# Altium PCB 底座.PcbDoc
Units mil, origin at the board's own origin, x right, y up, seen from the top; angles counter-clockwise.
Board outline 2975 x 2295 mil, 2 copper layers (Top Layer, Bottom Layer); 10 components, 38 nets, 76 pads, 0 vias.
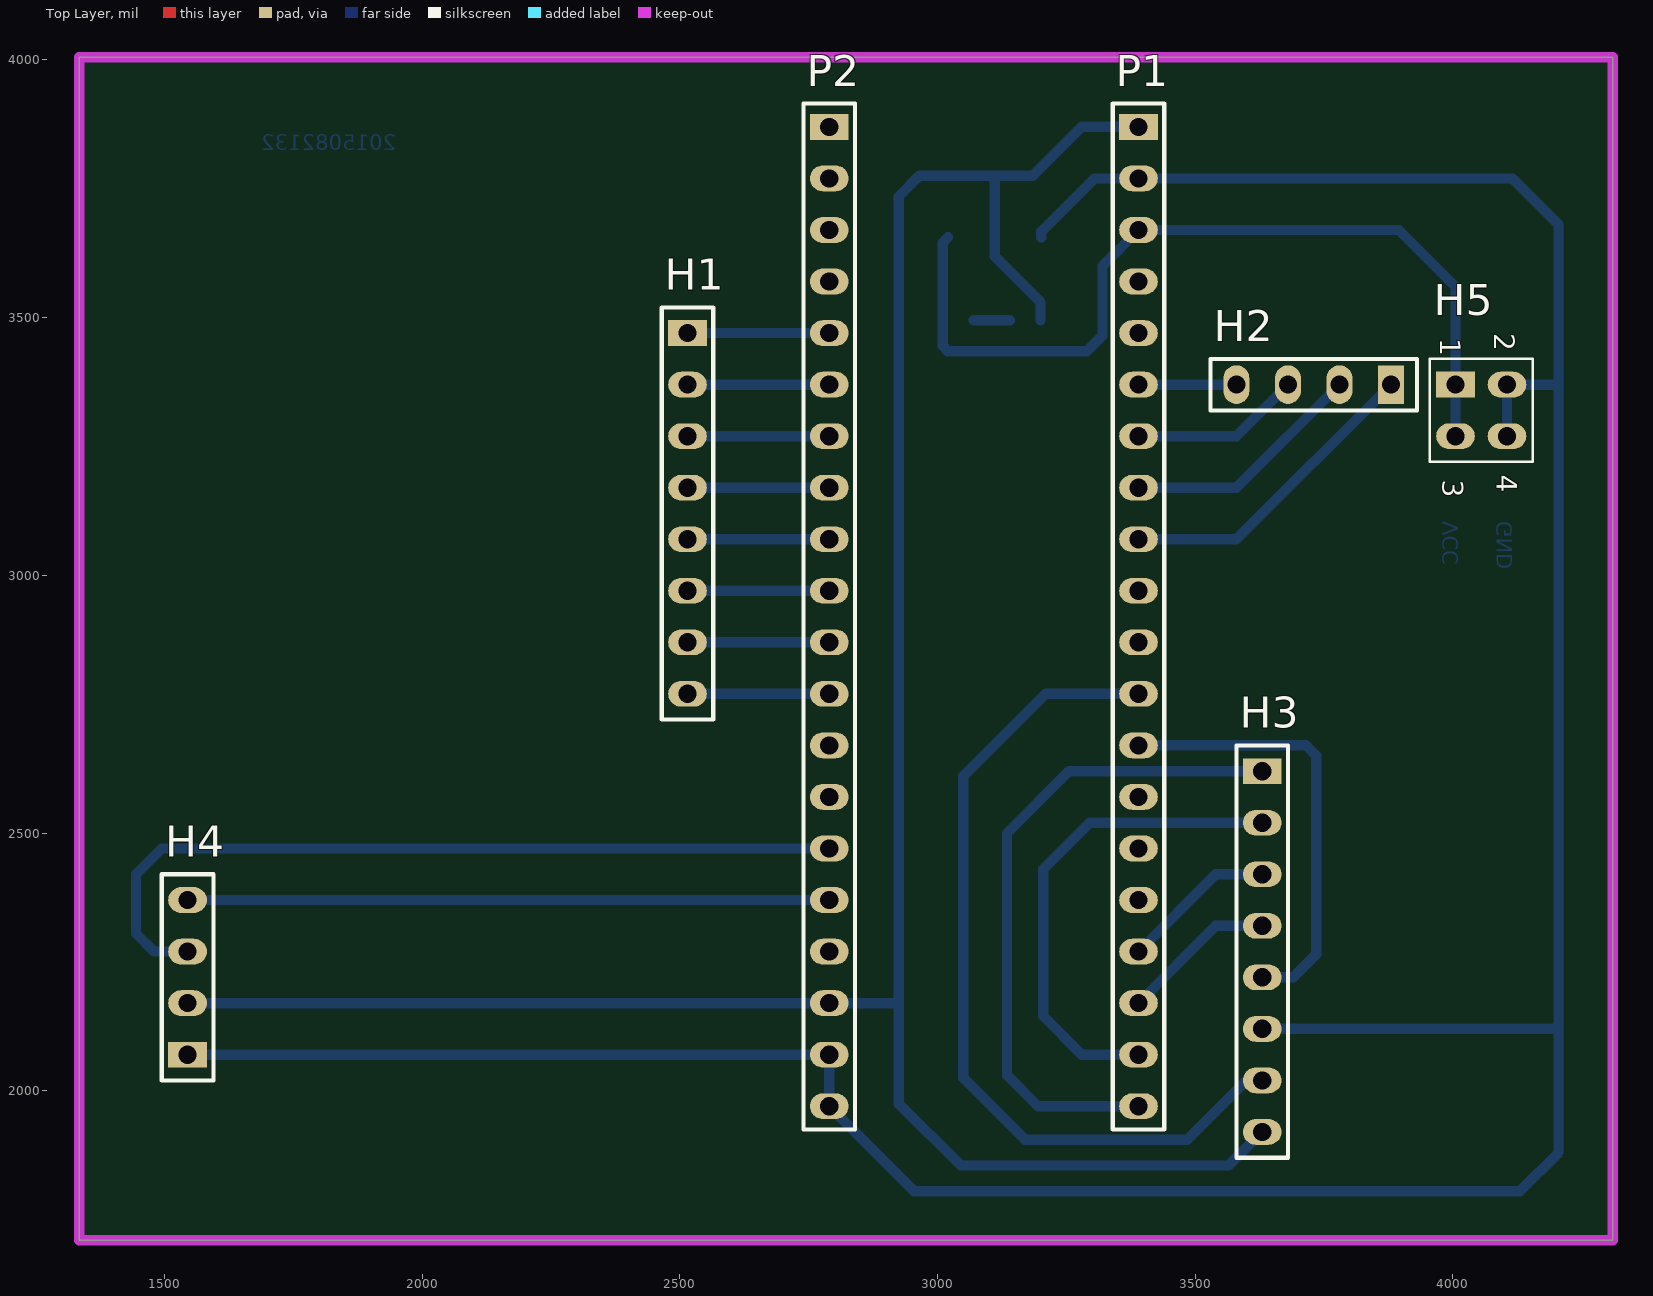
[diagram p0: Top Layer view]
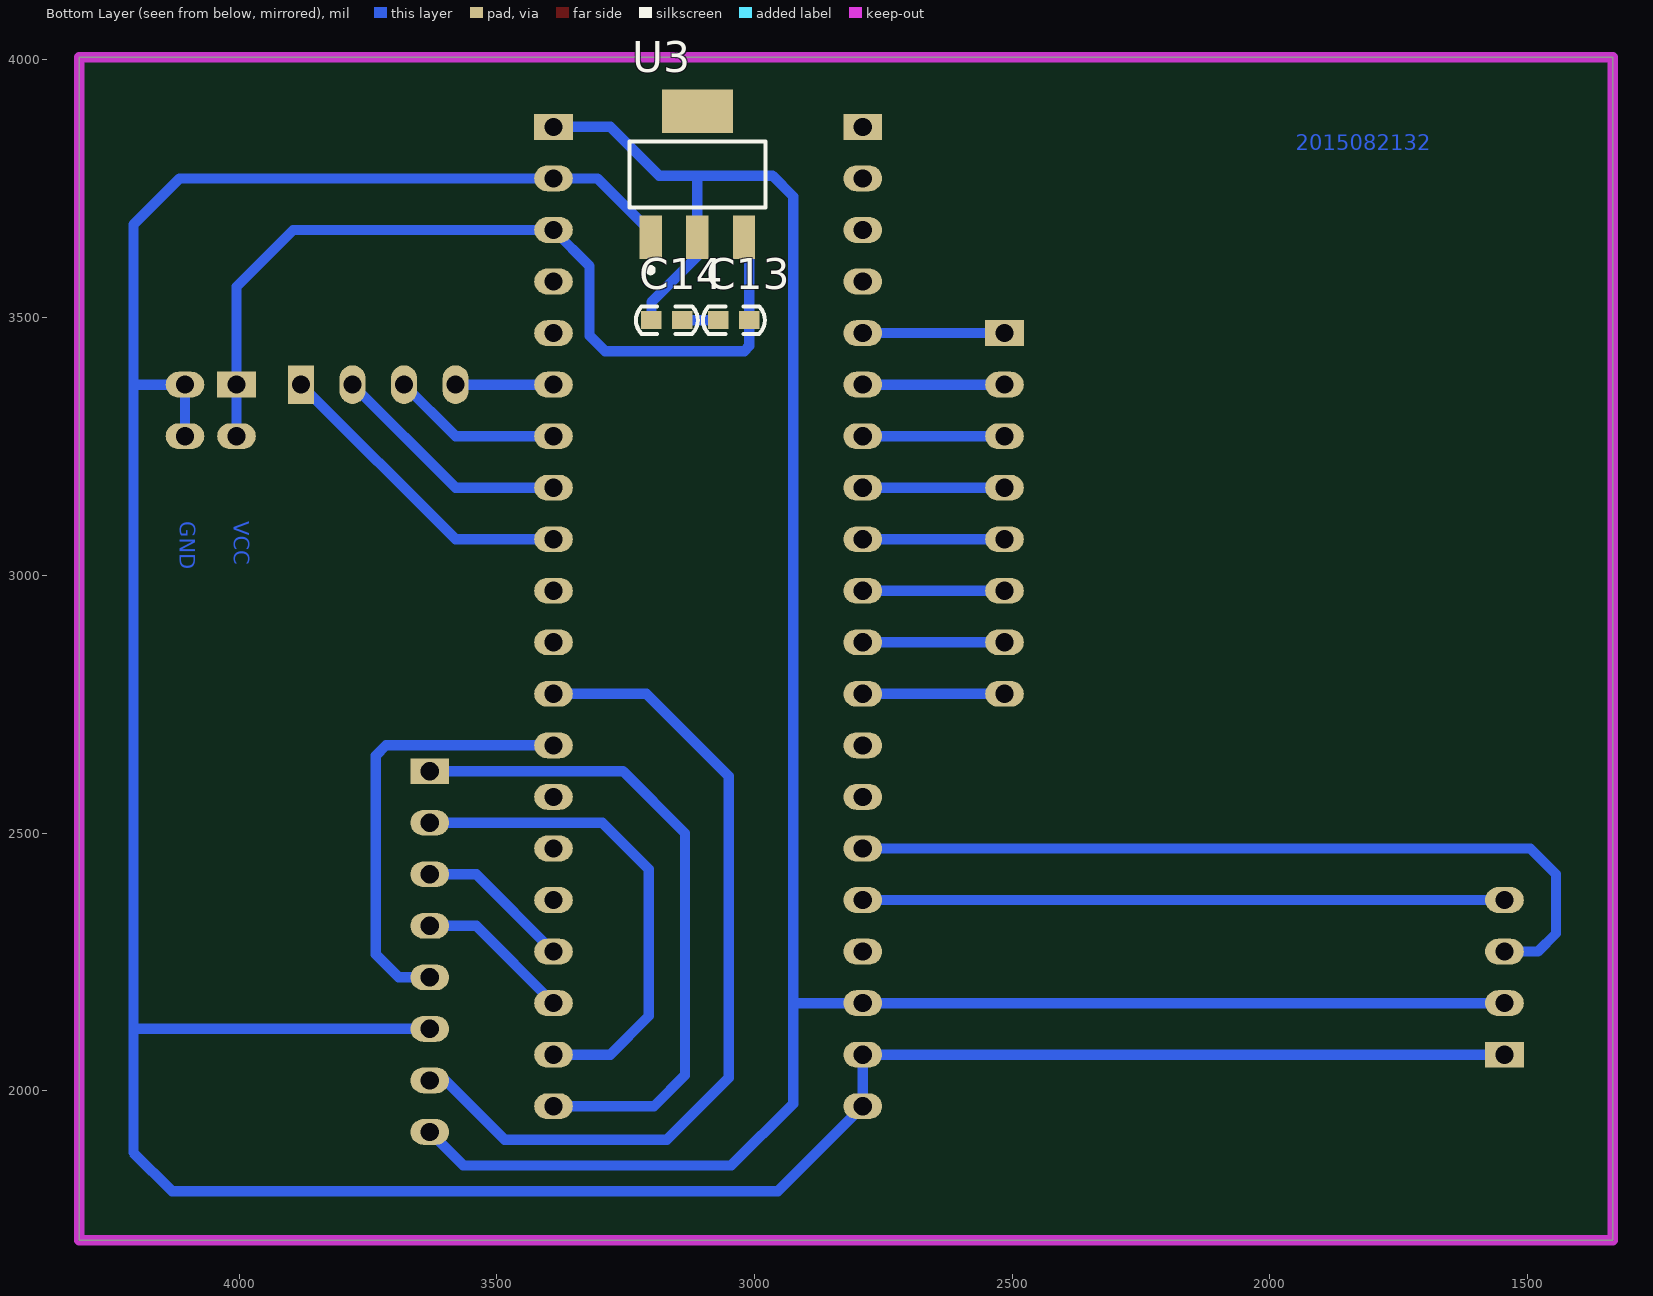
[diagram p1: Bottom Layer view, seen from below]
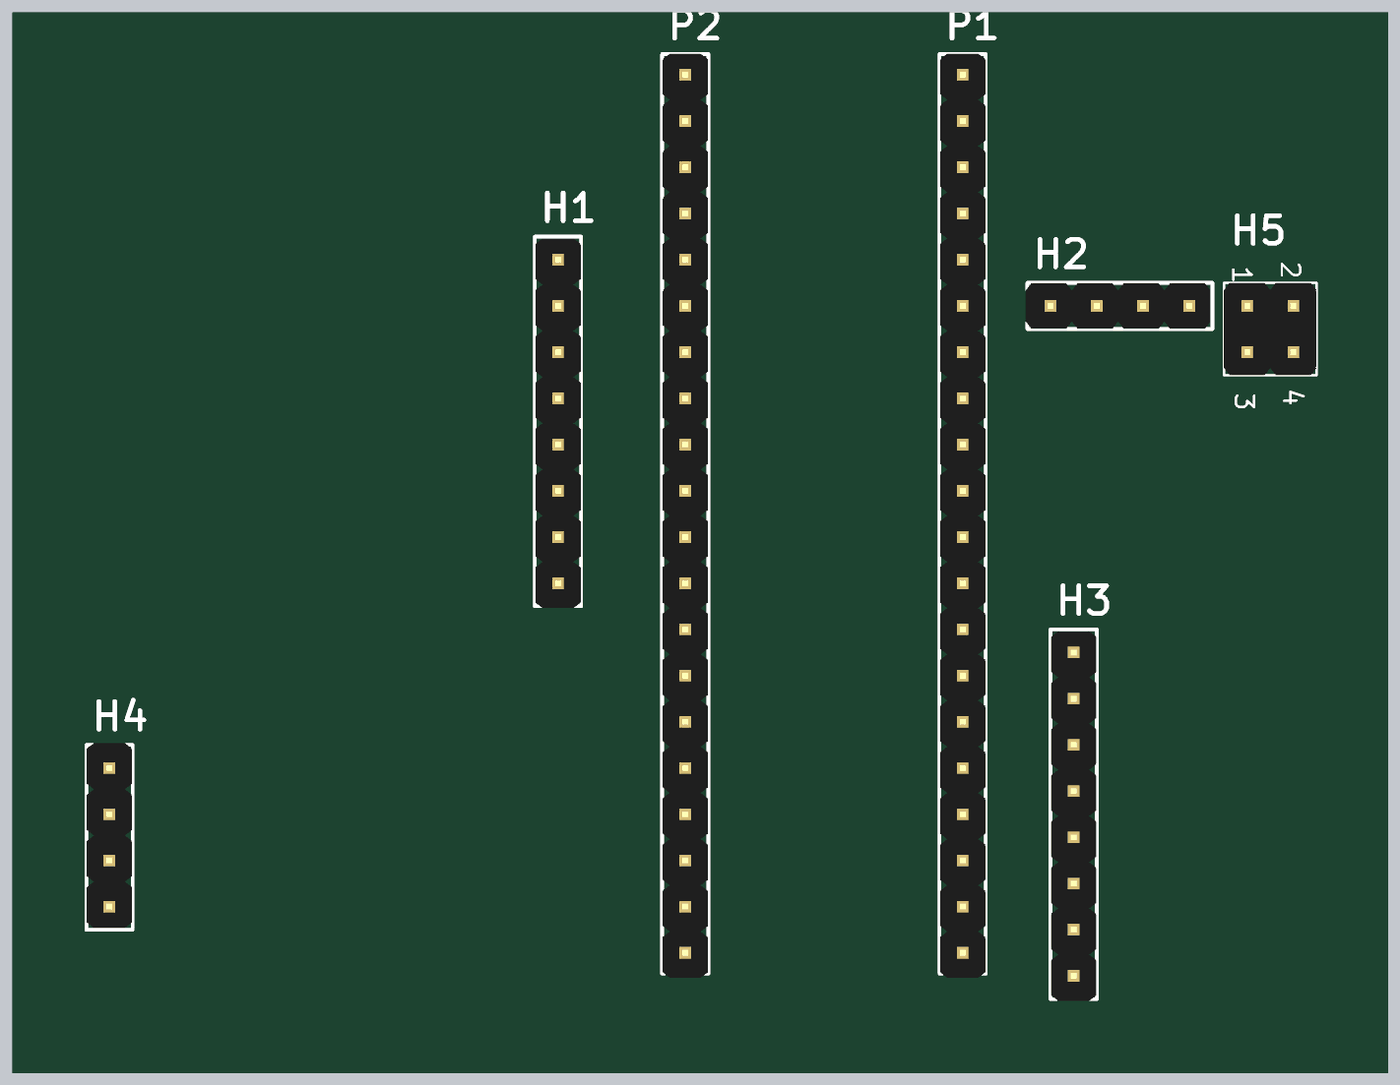
[diagram p2: 3D render of the assembled board from above, using the file's embedded part models]
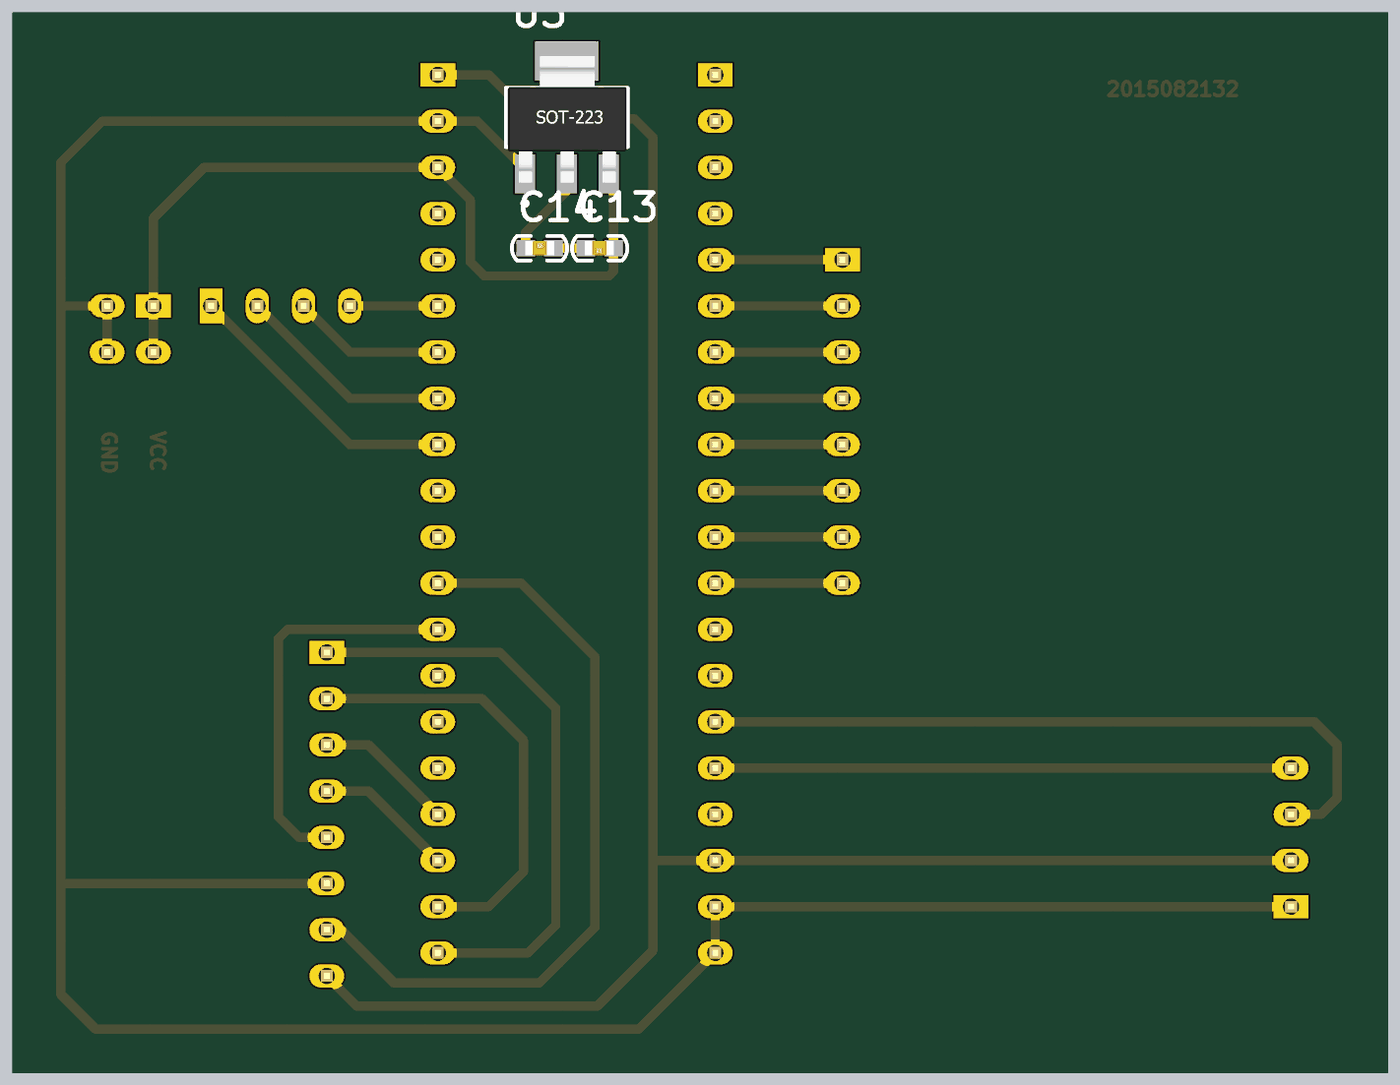
[diagram p3: 3D render of the assembled board from below, using the file's embedded part models]

## Layer stack, top to bottom
Top Layer: signal copper 1.4
Dielectric: dielectric 12.6, FR-4, Dk 4.8
Bottom Layer: signal copper 1.4

## Board outline
4310,4005 4310,1710 1355,1710 1335,1710 1335,4005

## Design rules (kind name [scope] priority, off if disabled: settings)
Clearance [All] p1: gap=10
PolygonConnect [All] p1: connectstyle=Relief reliefconductorwidth=10 reliefentries=4 polygonreliefangle="90 Angle"
RoutingVias [All] p1: holewidth=28 width=50 viastyle="Through Hole" minholewidth=28 minwidth=50 maxholewidth=28 maxwidth=50
SilkscreenOverComponentPads [All] p1: minsilkscreentomaskgap=10
SolderMaskExpansion [All] p1: expansion=4
Width [All] p1: maxlimit=25 minlimit=20 preferedwidth=20
27 further rules are at their usual default settings.

## Components (designator, comment, footprint, x,y, rotation, side; value= is the part's Value field where it differs from the comment)
C13 "" 0603C 3040,3495 r0 bottom
C14 "" 0603C 3170,3495 r180 bottom
H1 "Header 8" HDR1X8 2515,3120 r270 top
H2 "Header 4" HDR1X4 3730,3370 r180 top
H3 "Header 8" HDR1X8 3630,2270 r270 top
H4 "Header 4" HDR1X4 1545,2220 r90 top
H5 "Header 2X2" HDR2X2 4055,3320 r270 top
P1 "Header 20" HDR1X20 3390,2920 r270 top
P2 "Header 20" HDR1X20 2790,2920 r270 top
U3 "AMS1117adj" SOT223 3105,3770 r180 bottom

## Footprints (in the part's own frame and the unit in brackets; to place one, negate y for a bottom-side part, rotate by r counter-clockwise, add the part's x,y. Pads: shape width x height; smd on the part's side, far side on the other; paste and mask are expansions set on the pad)
0603C [mil]
  rect 40x35 smd: 1(-30,0) 2(30,0)
  silkscreen extent -60,-27 60,27, body extent -31,-16 32,16, height 12
HDR1X4 [mm] "Connector; Heade"
  rect 1.27x1.905 hole 0.9: 1(-3.81,0)
  oval 1.27x1.905 hole 0.9: 2(-1.27,0) 3(1.27,0) 4(3.81,0)
  silkscreen extent -5.08,-1.27 5.08,1.27, body extent -4.98,-1.25 5.18,1.25, height 8.2
HDR1X8 [mm] "Connector; Heade"
  rect 1.27x1.905 hole 0.9: 1(-8.89,0)
  oval 1.27x1.905 hole 0.9: 2(-6.35,0) 3(-3.81,0) 4(-1.27,0) 5(1.27,0) 6(3.81,0) 7(6.35,0) 8(8.89,0)
  silkscreen extent -10.16,-1.27 10.16,1.27, body extent -10.06,-1.25 10.26,1.25, height 8.2
HDR1X20 [mm] "Connector; Header"
  rect 1.27x1.905 hole 0.9: 1(-24.13,0)
  oval 1.27x1.905 hole 0.9: 2(-21.59,0) 3(-19.05,0) 4(-16.51,0) 5(-13.97,0) 6(-11.43,0) 7(-8.89,0) 8(-6.35,0) 9(-3.81,0) 10(-1.27,0) 11(1.27,0) 12(3.81,0) 13(6.35,0) 14(8.89,0) 15(11.43,0) 16(13.97,0) 17(16.51,0) 18(19.05,0) 19(21.59,0) 20(24.13,0)
  silkscreen extent -25.27,-1.27 25.27,1.27, body extent -25.3,-1.25 25.5,1.25, height 8.2
HDR2X2 [mm]
  rect 1.27x1.905 hole 0.9: 1(-1.27,-1.27)
  oval 1.27x1.905 hole 0.9: 2(-1.27,1.27) 3(1.27,-1.27) 4(1.27,1.27)
  silkscreen extent -2.54,-2.54 2.54,2.54, body extent -2.54,-2.54 2.54,2.54, height 8.5
SOT223 [mm]
  rect 1.1x2.15 smd: 1(-2.452,-2.897) 2(-0.152,-2.897) 3(2.148,-2.897)
  rect 3.5x2.15 smd: 4(-0.152,3.303)
  silkscreen extent -3.5,-4.65 3.2,1.83, body extent -3.38,-3.38 3.12,3.58, height 1.68

## Part data
C13 C14: library part Cap_0603
H1 H3: "Header, 8-Pin"
H2 H4: "Header, 4-Pin"
H5: "Header, 2-"
P1 P2: "Header, 20-Pin"
U3: "È"

## Nets (pads, with @x,y where several pads share a name; then routed paths per layer and width w, separated by ;. In a path a pad name is that pad's centre, name@x,y a point inside that pad or via, vN(x,y) a via of type N, cw(c..) or ccw(c..) an arc to the next point about the centre after c; other vN are vias at no path point)
5V: C13.1 H5.1 H5.3 P1.3 U3.3 | length 1726.4
  Bottom Layer w20: U3.3 3010,3645.5 3010,3445 3020,3435 3290,3435 3320,3465 3320,3600 P1.3 3895,3670 4005,3560 H5.1 H5.3
CS: H3.1 P1.20 | length 1294.6
  Bottom Layer w20: P1.20 3195,1970 3135,2030 3135,2500 3255,2620 H3.1
GND: H3.6 H4.1 H5.2 H5.4 P1.2 P2.19 P2.20 U3.1 | length 6528.6
  Bottom Layer w20: H4.1 P2.19 P2.20 2955,1805 4130,1805 4205,1880 4205,2120 ; U3.1 3201.55,3666.55 3305,3770 P1.2 4115,3770 4205,3680 4205,3370 ; H3.6 4205,2120 ; H5.4 H5.2 4205,3370 ; 4205,2120 4205,3370
IRQ: H3.5 P1.13 | length 861.9
  Bottom Layer w20: P1.13 3715,2670 3735,2650 3735,2265 3690,2220 H3.5
MISO: H3.4 P1.18 | length 302.1
  Bottom Layer w20: P1.18 3540,2320 H3.4
MOSI: H3.3 P1.17 | length 302.1
  Bottom Layer w20: P1.17 3540,2420 H3.3
NetC13_2: C13.2 C14.2 | length 70
  Bottom Layer w20: C13.2 C14.2
NRST: P2.17
PA0: H1.1 P2.5 | length 275
  Bottom Layer w20: H1.1 P2.5
PA1: H1.2 P2.6 | length 275
  Bottom Layer w20: H1.2 P2.6
PA2: H1.3 P2.7 | length 275
  Bottom Layer w20: H1.3 P2.7
PA3: H1.4 P2.8 | length 275
  Bottom Layer w20: H1.4 P2.8
PA4: H1.5 P2.9 | length 275
  Bottom Layer w20: H1.5 P2.9
PA5: H1.6 P2.10 | length 275
  Bottom Layer w20: H1.6 P2.10
PA6: H1.7 P2.11 | length 275
  Bottom Layer w20: H1.7 P2.11
PA7: H1.8 P2.12 | length 275
  Bottom Layer w20: H1.8 P2.12
PA8: P1.16
PA9: P1.15
PA10: P1.14
PA12: H3.7 P1.12 | length 1668.6
  Bottom Layer w20: P1.12 3210,2770 3050,2610 3050,2025 3170,1905 3485,1905 3600,2020 H3.7
PA15: P1.11
PB0: P2.13
PB1: P2.14
PB3: P1.10
PB4: H2.1 P1.9 | length 614.3
  Bottom Layer w20: P1.9 3580,3070 H2.1
PB5: H2.2 P1.8 | length 472.8
  Bottom Layer w20: P1.8 3580,3170 H2.2
PB6: H2.3 P1.7 | length 331.4
  Bottom Layer w20: P1.7 3580,3270 H2.3
PB7: H2.4 P1.6 | length 190
  Bottom Layer w20: P1.6 H2.4
PB8: P1.5
PB9: P1.4
PB10: H4.3 P2.15 | length 1595.2
  Bottom Layer w20: H4.3 1480,2270 1445,2305 1445,2420 1495,2470 P2.15
PB11: H4.4 P2.16 | length 1245
  Bottom Layer w20: H4.4 P2.16
PB13: H3.2 P1.19 | length 963.3
  Bottom Layer w20: P1.19 3280,2070 3205,2145 3205,2430 3295,2520 H3.2
PC13: P2.2
PC14: P2.3
PC15: P2.4
VBAT: P2.1
VCC3.3: C14.1 H3.8 H4.2 P1.1 P2.18 U3.2 | length 4759.4
  Bottom Layer w20: H4.2 P2.18 2925,2170 ; 3111,3775 U3.2 3111,3619 3200,3530 C14.1 ; P1.1 3280,3870 3185,3775 2965,3775 2925,3735 2925,2170 ; H3.8 3565,1855 3045,1855 2925,1975 2925,2170
pads on no net: U3.4

## Keep-outs
Keep-Out Layer:
  the board outline again, w20

## Other copper
Bottom Layer:
  text "2015082132" at 1950,3825 h30
  text "VCC" at 4010,3105 h30 r90
  text "GND" at 4115,3105 h30 r90

## Text inside footprints (layer, text, board x,y; h text height)
H5: Top Overlay "1" at 3975,3460 h40 r270; Top Overlay "2" at 4080,3470 h40 r270; Top Overlay "3" at 3980,3185 h40 r270; Top Overlay "4" at 4085,3195 h40 r270